# Altium PCB L-LRMAM36-FANN4-DK01-0402-03.PcbDoc
Units mm, origin at the board's own origin, x right, y up, seen from the top; angles counter-clockwise.
Board outline 222.2 x 196.2 mm, 4 copper layers (Top Layer, GND, VCC, Bottom Layer), stack 1.59 mm thick; 7 components, 177 nets, 10 pads, 0 vias.
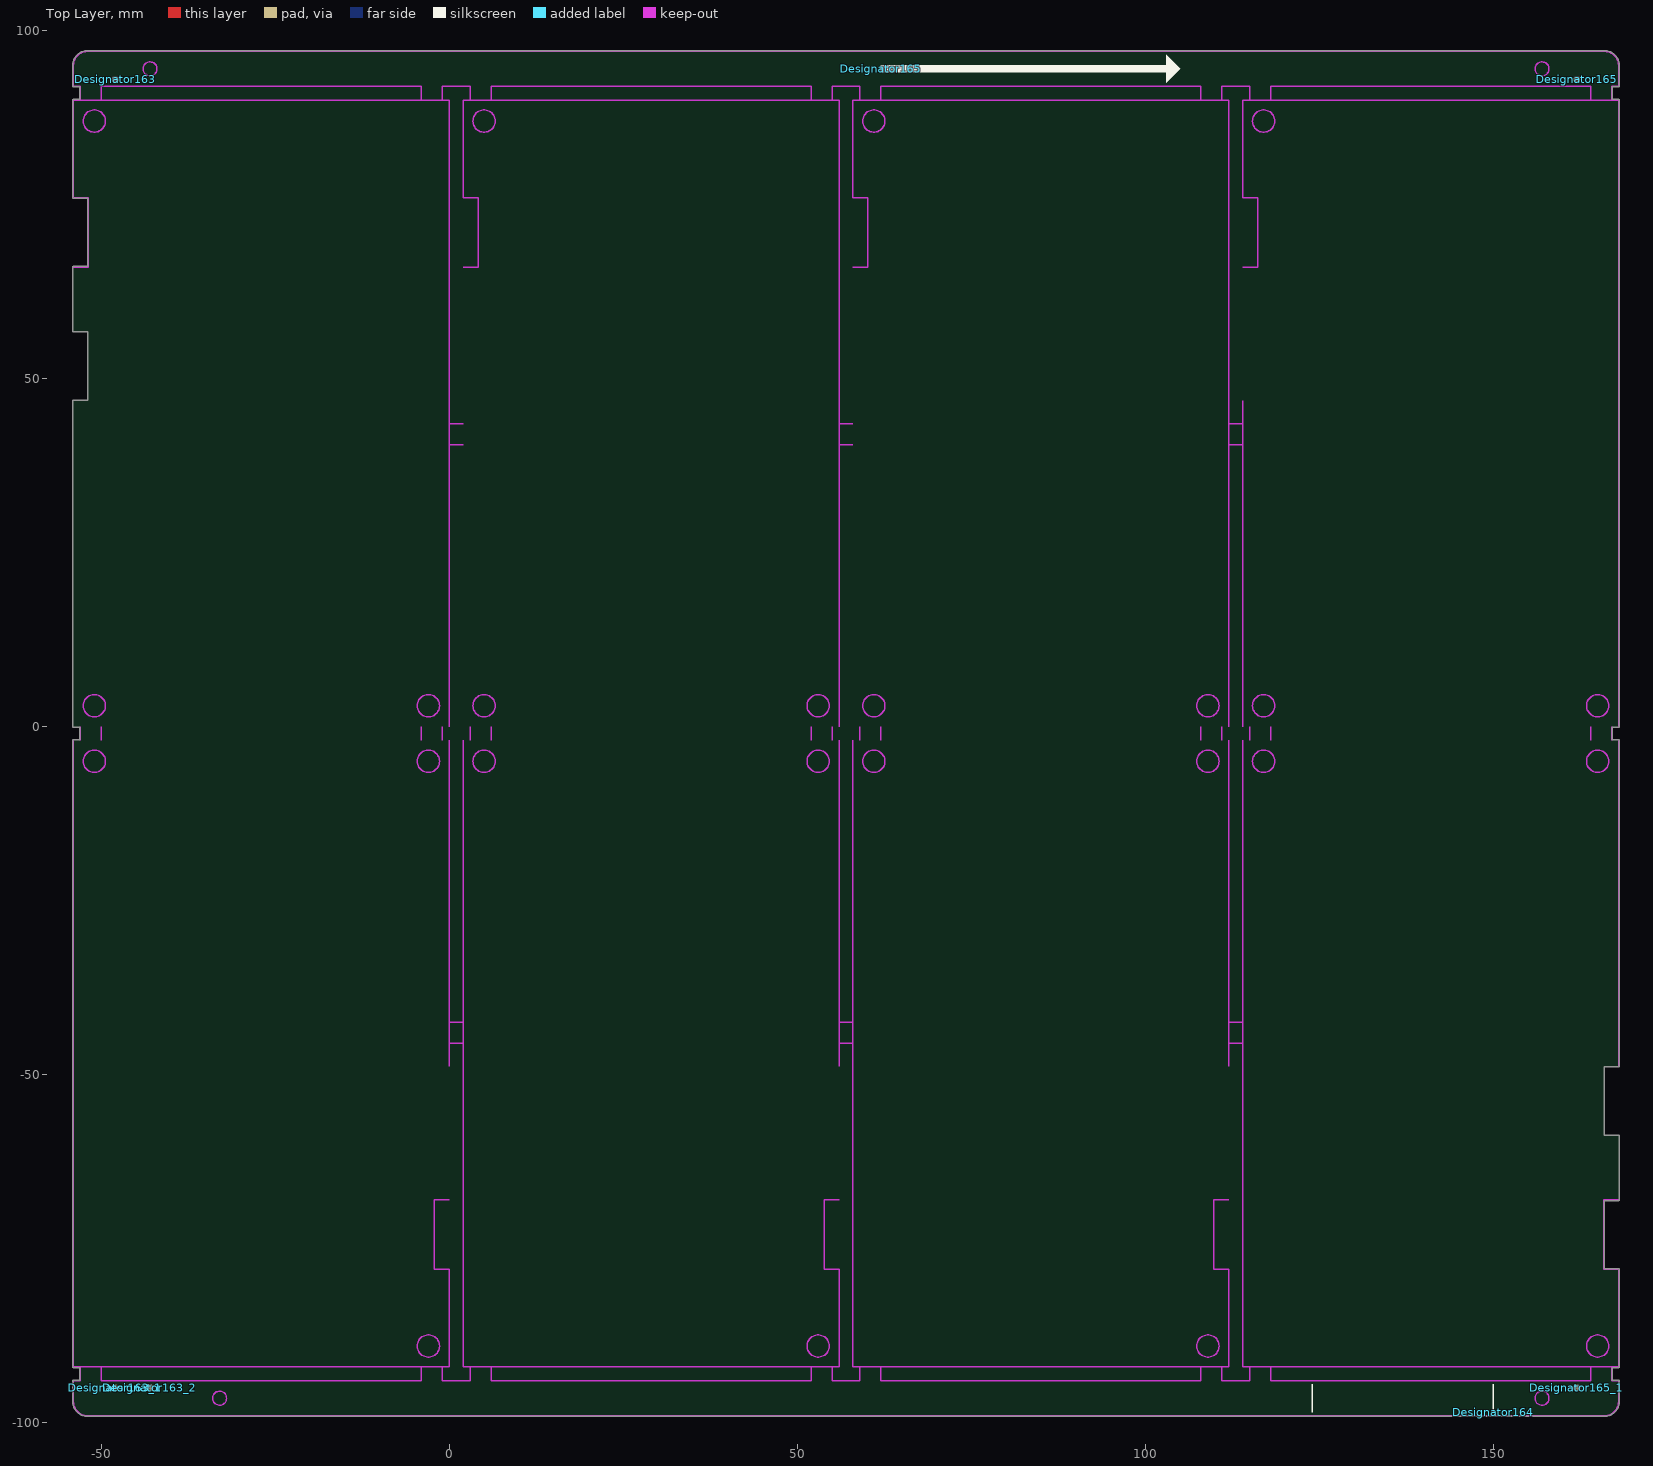
[diagram p0: Top Layer view]
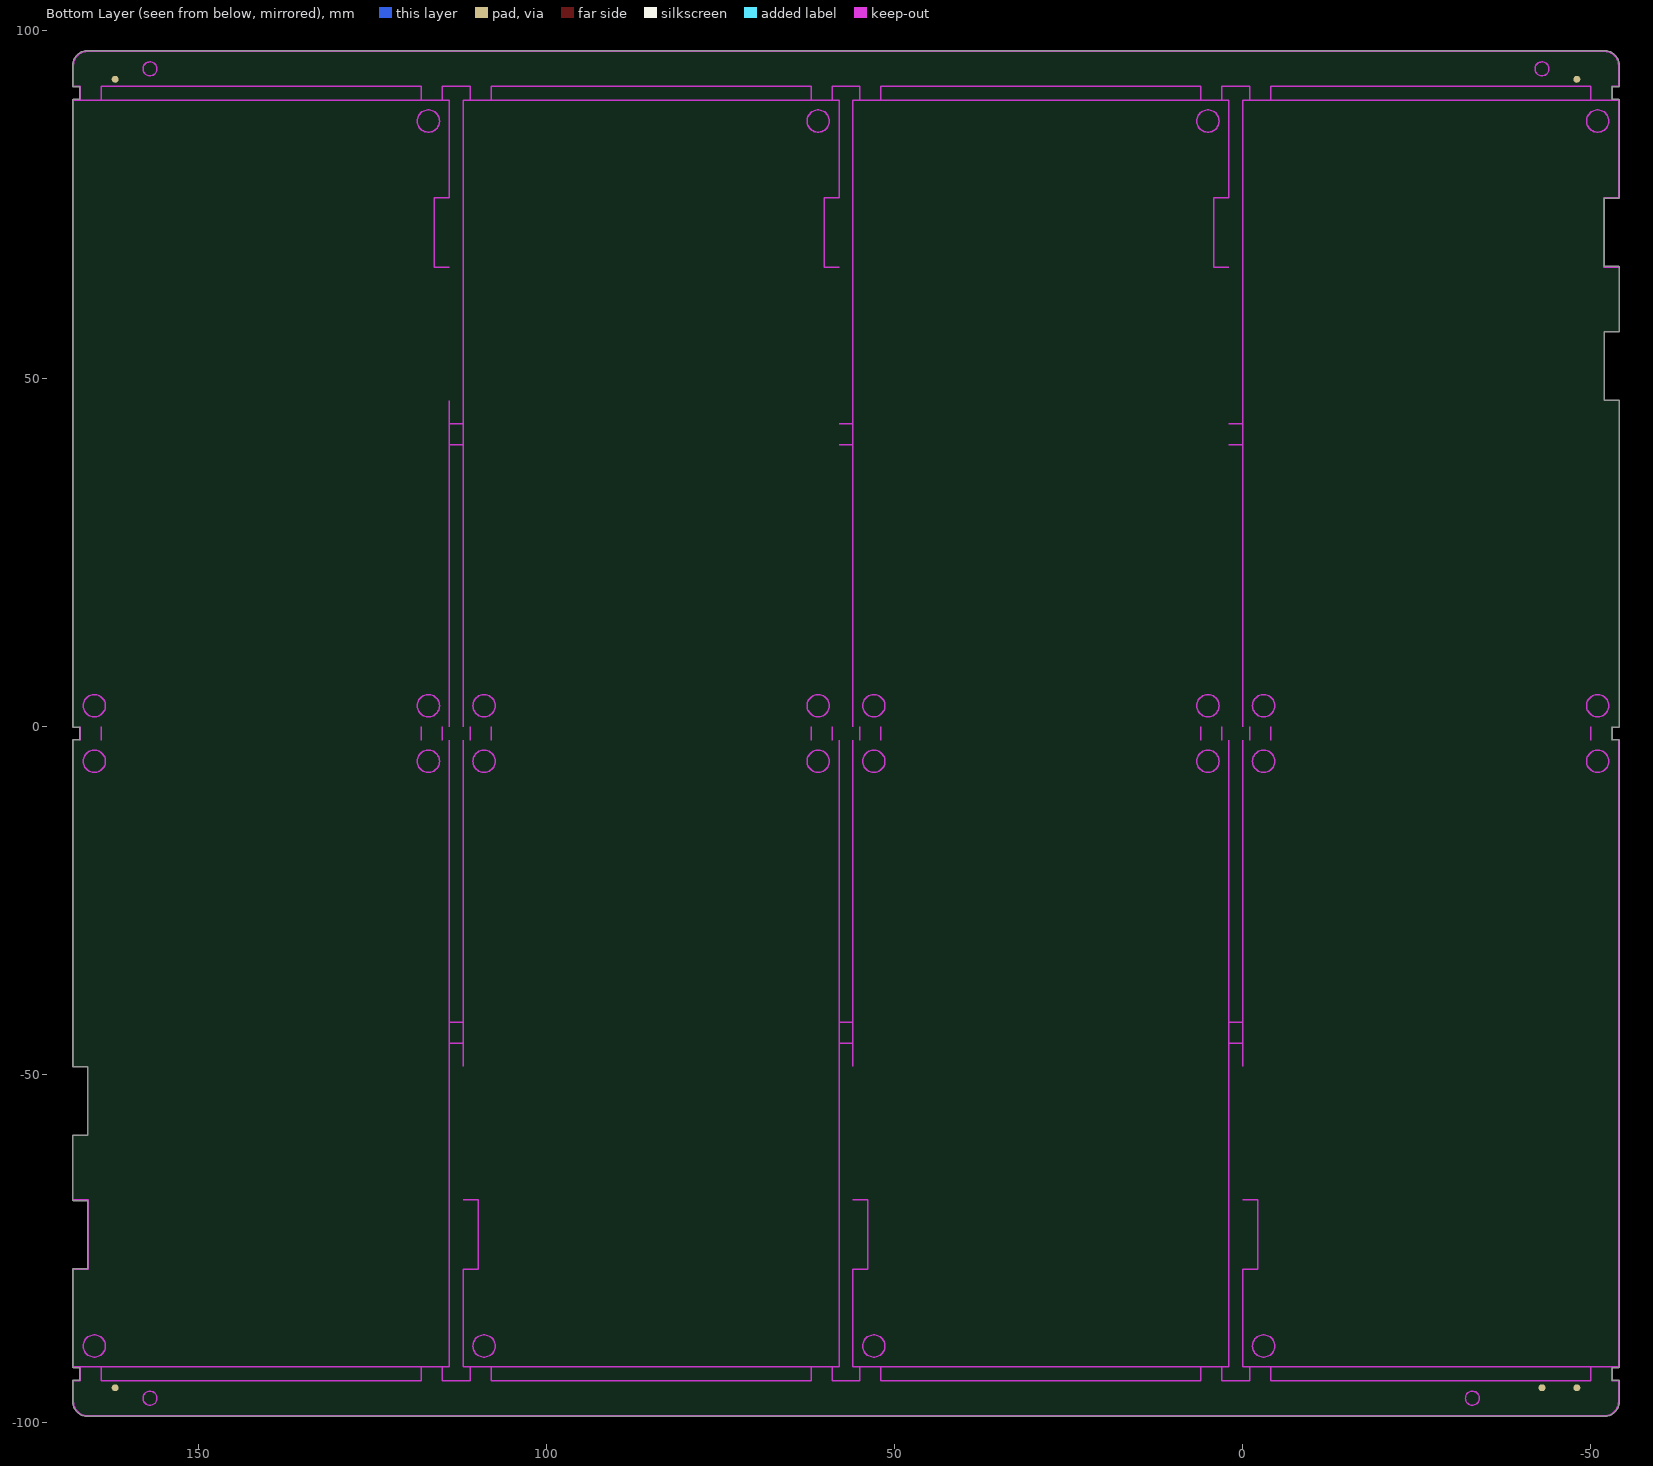
[diagram p1: Bottom Layer view, seen from below]

## Layer stack, top to bottom
Top Solder: solder mask 0.0102, Solder Resist, Dk 3.5
Top Layer: signal copper 0.035
Dielectric 2: prepreg 0.21, PP-006, Dk 4.1
GND: signal copper 0.018
Dielectric 1: dielectric 1.064, FR-4, Dk 4.8
VCC: signal copper 0.018
Dielectric 3: prepreg 0.21, PP-006, Dk 4.1
Bottom Layer: signal copper 0.035
Bottom Solder: solder mask 0.0102, Solder Resist, Dk 3.5

## Board outline
-54.1,-92 ccw(c-54,-92) -54,-92.1 -53.1,-92.1 -53.1,-93.9 -54,-93.9 ccw(c-54,-94) -54.1,-94 -54.1,-97 ccw(c-52,-97) -52,-99.1 -51.998,-99.1 166,-99.1 ccw(c166,-97) 168.1,-97 168.1,-94 ccw(c168,-94) 168,-93.9 167.1,-93.9 167.1,-92.1 168,-92.1 ccw(c168,-92) 168.1,-92 168.1,-78 ccw(c168,-78) 168,-77.9 165.95,-77.9 165.95,-68.1 168,-68.1 ccw(c168,-68) 168.1,-68 168.1,-58.8 ccw(c168,-58.8) 168,-58.7 165.95,-58.7 165.95,-48.9 168,-48.9 ccw(c168,-48.8) 168.1,-48.8 168.1,-2 ccw(c168,-2) 168,-1.9 167.1,-1.9 167.1,-0.1 168,-0.1 ccw(c168,0) 168.1,0 168.1,90 ccw(c168,90) 168,90.1 167.1,90.1 167.1,91.9 168,91.9 ccw(c168,92) 168.1,92 168.1,95 ccw(c166,95) 166,97.1 -52,97.1 ccw(c-52,95) -54.1,95 -54.1,92 ccw(c-54,92) -54,91.9 -53.1,91.9 -53.1,90.1 -54,90.1 ccw(c-54,90) -54.1,90 -54.1,76 ccw(c-54,76) -54,75.9 -51.95,75.9 -51.95,66.1 -54,66.1 ccw(c-54,66) -54.1,66 -54.1,56.8 ccw(c-54,56.8) -54,56.7 -51.95,56.7 -51.95,46.9 -54,46.9 ccw(c-54,46.8) -54.1,46.8 -54.1,0 ccw(c-54,0) -54,-0.1 -53.1,-0.1 -53.1,-1.9 -54,-1.9 ccw(c-54,-2) -54.1,-2

## Design rules (kind name [scope] priority, off if disabled: settings)
Clearance Clearance_via [IsVia vs IsVia] p1: gap=0.4 ignorepadtopadclearanceinfootprint=FALSE
Clearance Clearance_keepout [IsKeepOut] p2: gap=0.3 ignorepadtopadclearanceinfootprint=FALSE
Clearance Clearance_polygon [InPolygon] p3: gap=0.254 ignorepadtopadclearanceinfootprint=FALSE
Clearance Clearance_1 [InComponent('U10') or InComponent('K1')or InComponent('K2')] p4: gap=0.152 ignorepadtopadclearanceinfootprint=FALSE
Clearance [All] p5: gap=0.152 ignorepadtopadclearanceinfootprint=FALSE except(0.203: Arc-Fill Arc-Poly Arc-Region Track-Fill Track-Poly Track-Region SMDPad-Fill SMDPad-Poly SMDPad-Region THPad-Fill THPad-Poly THPad-Region Via-Fill Via-Poly Via-Region Fill-Fill Fill-Poly Fill-Region Poly-Poly Poly-Region Region-Region)
DiffPairsRouting [All] p1: maxlimit=0.254 minlimit=0.152 mostfreqgap=0.254 toplayer_minwidth=0.241 toplayer_maxwidth=0.381 toplayer_prefwidth=0.381 midlayer1_minwidth=0.191 midlayer1_maxwidth=0.381 midlayer1_prefwidth=0.381 midlayer2_minwidth=0.191 midlayer2_maxwidth=0.381 midlayer2_prefwidth=0.381 bottomlayer_minwidth=0.241 bottomlayer_maxwidth=0.381 bottomlayer_prefwidth=0.381 maxuncoupledlength=12.7
HoleSize [All] p1: absolutevalues=TRUE maxlimit=5 minlimit=0.025 maxpercent=80.000 minpercent=20.000
HoleToHoleClearance [All] p1: gap=0.05 allowstackedmicrovias=TRUE
MinimumSolderMaskSliver [All] p1: minsoldermaskwidth=0
PolygonConnect [All] p1: thpad.connectstyle=Relief thpad.reliefconductorwidth=0.254 thpad.reliefentries=4 thpad.polygonreliefangle="90 Angle" thpad.airgapwidth=0.254 smdpad.connectstyle=Direct smdpad.reliefconductorwidth=0.254 smdpad.reliefentries=4 smdpad.polygonreliefangle="90 Angle" smdpad.airgapwidth=0.254 via.connectstyle=Direct via.reliefconductorwidth=0.254 via.reliefentries=4 via.polygonreliefangle="90 Angle" via.airgapwidth=0.254
RoutingVias [All] p1: holewidth=0.3 width=0.5 viastyle="Through Hole" minholewidth=0.3 minwidth=0.5 maxholewidth=3 maxwidth=5
SilkToSilkClearance [All] p1: silktosilkclearance=0
SilkToSolderMaskClearance [IsPad] p1: minsilkscreentomaskgap=0 clearancetoexposedcopper=TRUE
SolderMaskExpansion [All] p1: expansion=0.102 istentingtop=FALSE
SupplyNets "Schematic Supply Nets_13" [InNet('VCC_1V8')] p1: voltage=0.000
SupplyNets "Schematic Supply Nets_12" [InNet('VDD_3.3V')] p2: voltage=0.000
SupplyNets "Schematic Supply Nets_11" [InNet('3.3V_8311')] p3: voltage=0.000
SupplyNets "Schematic Supply Nets_10" [InNet('PAGND')] p4: voltage=0.000
SupplyNets "Schematic Supply Nets_9" [InNet('VBUS1')] p5: voltage=0.000
SupplyNets "Schematic Supply Nets_8" [InNet('VCC_2V8')] p6: voltage=0.000
SupplyNets "Schematic Supply Nets_7" [InNet('VBAT_Li')] p7: voltage=0.000
SupplyNets "Schematic Supply Nets_6" [InNet('GND')] p8: voltage=0.000
SupplyNets "Schematic Supply Nets_5" [InNet('VDD_PA')] p9: voltage=0.000
SupplyNets "Schematic Supply Nets_4" [InNet('V3P3')] p10: voltage=0.000
SupplyNets "Schematic Supply Nets_3" [InNet('MIC_N')] p11: voltage=0.000
SupplyNets "Schematic Supply Nets_2" [InNet('VDD_3V3')] p12: voltage=0.000
SupplyNets "Schematic Supply Nets_1" [InNet('V5P0')] p13: voltage=0.000
SupplyNets "Schematic Supply Nets" [InNet('VBUS2')] p14: voltage=0.000
UnRoutedNet [All] p1: checkbadconnections=TRUE
Width [All] p1: maxlimit=3.81 minlimit=0.152 preferedwidth=0.254
23 further rules are at their usual default settings.

## Classes and differential pairs
differential pair USB2: +USB2_P -USB2_N
differential pair USB1: +USB1_P -USB1_N
differential pair D2: +D2_P -D2_N
differential pair D1: +D1_P -D1_N
differential pair AM36_USBD: +AM36_USBD_P -AM36_USBD_N

## Components (designator, comment, footprint, x,y, rotation, side; value= is the part's Value field where it differs from the comment)
Designator163 "Comment" MARK -48,93 r0 top
Designator163_1 "Comment" MARK -48,-95 r0 top
Designator163_2 "Comment" MARK -43,-95 r0 top
Designator164 "Comment" "White oil-26X4" 150,-98.5 r0 top
Designator165 "Comment" Arrow 62,94.5 r0 top
Designator165 "Comment" MARK 162,93 r180 top
Designator165_1 "Comment" MARK 162,-95 r180 top

## Footprints (in the part's own frame and the unit in brackets; to place one, negate y for a bottom-side part, rotate by r counter-clockwise, add the part's x,y. Pads: shape width x height; smd on the part's side, far side on the other; paste and mask are expansions set on the pad)
Arrow [mm] "方向箭头"
  silkscreen extent 0,-2 43,2
MARK [mm]
  round 1 smd mask+0.5: 1(0,0)
  round 1 smd far side mask+0.5: 2(0,0)
  Top Layer pour cut-out: -1.5,0 -1.386,-0.574 -1.061,-1.061 -0.574,-1.386 0,-1.5 0,-1.5 0.574,-1.386 1.061,-1.061 1.386,-0.574 1.5,0 1.5,0 1.386,0.574 1.061,1.061 0.574,1.386 0,1.5 0,1.5 -0.574,1.386 -1.061,1.061 -1.386,0.574 -1.5,0
  Bottom Layer pour cut-out: -1.5,0 -1.386,-0.574 -1.061,-1.061 -0.574,-1.386 0,-1.5 0,-1.5 0.574,-1.386 1.061,-1.061 1.386,-0.574 1.5,0 1.5,0 1.386,0.574 1.061,1.061 0.574,1.386 0,1.5 0,1.5 -0.574,1.386 -1.061,1.061 -1.386,0.574 -1.5,0
"White oil-26X4" [mm] "二维码白油框"
  silkscreen extent -26,0 0,4

## Nets (pads, with @x,y where several pads share a name; then routed paths per layer and width w, separated by ;. In a path a pad name is that pad's centre, name@x,y a point inside that pad or via, vN(x,y) a via of type N, cw(c..) or ccw(c..) an arc to the next point about the centre after c; other vN are vias at no path point)
3.3V_8311: 
A0: 
A1: 
A2: 
AM36_USBD_N: 
AM36_USBD_P: 
AUD_N: 
AUD_P: 
BOOT: 
CHIP_PU: 
CODEC_I2S0_BCLK: 
CODEC_I2S0_DIN: 
CODEC_I2S0_DOUT: 
CODEC_I2S0_LRCK: 
CODEC_I2S0_MCLK: 
D0: 
D1: 
D1_N: 
D1_P: 
D2: 
D2_N: 
D2_P: 
D3: 
DTR: 
GND: 
GPIO1: 
GPIO2: 
GPIO3: 
GPIO4: 
GPIO5: 
GPIO6: 
GPIO7: 
GPIO8: 
GPIO9: 
GPIO10: 
GPIO11: 
GPIO12: 
GPIO13: 
GPIO14: 
GPIO15: 
GPIO16: 
GPIO18: 
GPIO45: 
GPIO46: 
HSYNC: 
I2C0_SCL: 
I2C0_SDA: 
KEY_ADC: 
LCD_CLK: 
LCD_CS1: 
LCD_CS2: 
LCD_D0: 
LCD_D1: 
LCD_D2: 
LCD_D3: 
LCD_LED: 
LCD_RST: 
LCD_TE: 
LED_B: 
LED_G: 
LED_R: 
LoRa_RF: 
MCLK: 
MIC_N: 
MIC_N_OUT: 
MIC_P: 
MIC_P_OUT: 
MUTE: 
NetANT1_1: 
NetANT2_1: 
NetC2_2: 
NetC13_1: 
NetC18_2: 
NetC30_2: 
NetC31_2: 
NetC35_1: 
NetC35_2: 
NetC36_1: 
NetC36_2: 
NetC37_2: 
NetC38_2: 
NetC39_2: 
NetC40_2: 
NetC41_2: 
NetC42_1: 
NetC42_2: 
NetC43_1: 
NetC43_2: 
NetC45_2: 
NetC48_2: 
NetC53_2: 
NetC57_2: 
NetC58_2: 
NetC60_1: 
NetC66_2: 
NetC67_2: 
NetC68_2: 
NetC69_1: 
NetC70_2: 
NetC71_1: 
NetC79_2: 
NetC90_1: 
NetC91_2: 
NetCON1_A5: 
NetCON1_B5: 
NetCON2_A5: 
NetCON2_B5: 
NetCON5_1: 
NetCON5_2: 
NetD10_1: 
NetD10_2: 
NetD10_3: 
NetFPC1_3: 
NetFPC1_5: 
NetK3_1: 
NetK4_1: 
NetK5_1: 
NetK6_1: 
NetL2_1: 
NetLED1_A: 
NetLED2_K: 
NetLED3_K: 
NetR5_1: 
NetR6_2: 
NetR7_1: 
NetR9_1: 
NetR11_1: 
NetR15_1: 
NetR16_2: 
NetR17_2: 
NetR22_1: 
NetR23_2: 
NetR35_2: 
NetR36_1: 
NetR73_2: 
NetR75_1: 
NetR85_2: 
NetR86_1: 
NetR87_1: 
NetR95_2: 
OUTN: 
OUTP: 
P0: 
P1: 
P2: 
P3: 
P4: 
P5: 
P6: 
P7: 
PAGND: 
PCLK: 
PWDN: 
RTS: 
TP_INT: 
TP_RST: 
UART0_RX: 
UART0_TX: 
UART2_RX: 
UART2_TX: 
USB1_N: 
USB1_P: 
USB2_N: 
USB2_P: 
V3P3: 
V5P0: 
VBAT_ADC: 
VBAT_Li: 
VBUS1: 
VBUS2: 
VCC_1V8: 
VCC_2V8: 
VDD_3.3V: 
VDD_3V3: 
VDD_PA: 
VSYNC: 
WiFi_RF: 
pads on no net: Designator163.1 Designator163.2 Designator163_1.1 Designator163_1.2 Designator163_2.1 Designator163_2.2 Designator165.1 Designator165.2 Designator165_1.1 Designator165_1.2

## Keep-outs
Keep-Out Layer:
  circle w0.2: c-33,-96.5 r1
  circle w0.2: c157,-96.5 r1
  circle w0.2: c157,94.5 r1
  circle w0.2: c-43,94.5 r1
  circle w0.2: c109,3 r1.6
  circle w0.2: c61,3 r1.6
  circle w0.2: c61,87 r1.6
  circle w0.2: c53,-89 r1.6
  circle w0.2: c53,-5 r1.6
  circle w0.2: c5,-5 r1.6
  circle w0.2: c-51,-5 r1.6
  circle w0.2: c-3,-5 r1.6
  circle w0.2: c-3,-89 r1.6
  circle w0.2: c117,87 r1.6
  circle w0.2: c117,3 r1.6
  circle w0.2: c165,3 r1.6
  circle w0.2: c61,-5 r1.6
  circle w0.2: c109,-5 r1.6
  circle w0.2: c109,-89 r1.6
  circle w0.2: c5,87 r1.6
  circle w0.2: c5,3 r1.6
  circle w0.2: c53,3 r1.6
  circle w0.2: c-3,3 r1.6
  circle w0.2: c-51,3 r1.6
  circle w0.2: c-51,87 r1.6
  circle w0.2: c165,-89 r1.6
  circle w0.2: c165,-5 r1.6
  circle w0.2: c117,-5 r1.6
  lines w0.2: -54,-2 -54,-92 0,-92 0,-78 -2.15,-78 -2.15,-68 0,-68 ; -54,66 -51.85,66 -51.85,76 -54,76 -54,90 0,90 0,0 ; -53,-92 -53,-94 -54,-94 -54,-97 ccw(c-52,-97) -52,-99 166,-99 ccw(c166,-97) 168,-97 168,-94 167,-94 167,-92 ; -53,-2 -53,0 ; -53,90 -53,92 -54,92 -54,95 cw(c-52,95) -52,97 166,97 cw(c166,95) 168,95 168,92 167,92 167,90 ; -50,-92 -50,-94 -4,-94 -4,-92 ; -50,-2 -50,0 ; -50,90 -50,92 -4,92 -4,90 ; -4,-2 -4,0 ; -1,-92 -1,-94 3,-94 3,-92 ; -1,-2 -1,0 ; -1,90 -1,92 3,92 3,90 ; 0,-48.8 0,-2 ; 0,-45.5 2,-45.5 ; 0,-42.5 2,-42.5 ; 0,40.5 2,40.5 ; 0,43.5 2,43.5 ; 2,-2 2,-92 56,-92 56,-78 53.85,-78 53.85,-68 56,-68 ; 2,66 4.15,66 4.15,76 2,76 2,90 56,90 56,0 ; 3,-2 3,0 ; 6,-92 6,-94 52,-94 52,-92 ; 6,-2 6,0 ; 6,90 6,92 52,92 52,90 ; 52,-2 52,0 ; 55,-92 55,-94 59,-94 59,-92 ; 55,-2 55,0 ; 55,90 55,92 59,92 59,90 ; 56,-48.8 56,-2 ; 56,-45.5 58,-45.5 ; 56,-42.5 58,-42.5 ; 56,40.5 58,40.5 ; 56,43.5 58,43.5 ; 58,-2 58,-92 112,-92 112,-78 109.85,-78 109.85,-68 112,-68 ; 58,66 60.15,66 60.15,76 58,76 58,90 112,90 112,0 ; 59,-2 59,0 ; 62,-92 62,-94 108,-94 108,-92 ; 62,-2 62,0 ; 62,90 62,92 108,92 108,90 ; 108,-2 108,0 ; 111,-92 111,-94 115,-94 115,-92 ; 111,-2 111,0 ; 111,90 111,92 115,92 115,90 ; 112,-48.8 112,-2 ; 112,-45.5 114,-45.5 ; 112,-42.5 114,-42.5 ; 112,40.5 114,40.5 ; 112,43.5 114,43.5 ; 114,-2 114,-92 168,-92 168,-78 165.85,-78 165.85,-68 168,-68 ; 114,0 114,46.8 ; 114,66 116.15,66 116.15,76 114,76 114,90 168,90 168,0 ; 115,-2 115,0 ; 118,-92 118,-94 164,-94 164,-92 ; 118,-2 118,0 ; 118,90 118,92 164,92 164,90 ; 164,-2 164,0 ; 167,-2 167,0 ; 168,-48.8 168,-2

## Silkscreen, mask and mechanical layers (free items; w line width, h text height)
Top Solder:
  rectangle: -53,-94 -50,-92
  region: -1,-92 -4,-92 -4,-94 -1,-94
  region: 55,-92 52,-92 52,-94 55,-94
  rectangle: 3,-94 6,-92
  region: 111,-92 108,-92 108,-94 111,-94
  rectangle: 59,-94 62,-92
  region: 167,-92 164,-92 164,-94 167,-94
  rectangle: 115,-94 118,-92
  rectangle: 115,-2 118,0
  region: 167,0 164,0 164,-2 167,-2
  rectangle: 59,-2 62,0
  region: 111,0 108,0 108,-2 111,-2
  rectangle: 3,-2 6,0
  region: 55,0 52,0 52,-2 55,-2
  rectangle: -53,-2 -50,0
  region: -1,0 -4,0 -4,-2 -1,-2
  rectangle: 115,90 118,92
  region: 167,92 164,92 164,90 167,90
  rectangle: 59,90 62,92
  region: 111,92 108,92 108,90 111,90
  rectangle: 3,90 6,92
  region: 55,92 52,92 52,90 55,90
  region: -1,92 -4,92 -4,90 -1,90
  rectangle: -53,90 -50,92
  region: 114,-42.5 112,-42.5 112,-45.5 114,-45.5
  region: 58,-42.5 56,-42.5 56,-45.5 58,-45.5
  region: 2,-42.5 0,-42.5 0,-45.5 2,-45.5
  rectangle: 112,40.5 114,43.5
  rectangle: 56,40.5 58,43.5
  rectangle: 0,40.5 2,43.5
Bottom Solder:
  rectangle: -53,-94 -50,-92
  region: -1,-92 -4,-92 -4,-94 -1,-94
  region: 55,-92 52,-92 52,-94 55,-94
  rectangle: 3,-94 6,-92
  region: 111,-92 108,-92 108,-94 111,-94
  rectangle: 59,-94 62,-92
  region: 167,-92 164,-92 164,-94 167,-94
  rectangle: 115,-94 118,-92
  rectangle: 115,-2 118,0
  region: 167,0 164,0 164,-2 167,-2
  rectangle: 59,-2 62,0
  region: 111,0 108,0 108,-2 111,-2
  rectangle: 3,-2 6,0
  region: 55,0 52,0 52,-2 55,-2
  rectangle: -53,-2 -50,0
  region: -1,0 -4,0 -4,-2 -1,-2
  rectangle: 115,90 118,92
  region: 167,92 164,92 164,90 167,90
  rectangle: 59,90 62,92
  region: 111,92 108,92 108,90 111,90
  rectangle: 3,90 6,92
  region: 55,92 52,92 52,90 55,90
  region: -1,92 -4,92 -4,90 -1,90
  rectangle: -53,90 -50,92
  region: 114,-42.5 112,-42.5 112,-45.5 114,-45.5
  region: 58,-42.5 56,-42.5 56,-45.5 58,-45.5
  region: 2,-42.5 0,-42.5 0,-45.5 2,-45.5
  rectangle: 112,40.5 114,43.5
  rectangle: 56,40.5 58,43.5
  rectangle: 0,40.5 2,43.5
Drill Drawing:
  circle w0.254: c180.851,-71.298 r0.701
  lines w0.254: 180.15,-78.307 180.851,-77.957 181.552,-78.307 181.202,-77.606 181.552,-76.905 180.851,-77.256 180.15,-76.905 180.501,-77.606 180.15,-78.307 ; 180.15,-75.153 181.552,-75.153 181.552,-73.751 180.15,-73.751 180.15,-75.153 ; 180.15,-68.494 180.501,-68.494 180.851,-68.845 181.202,-68.494 181.552,-68.494 181.202,-68.144 181.552,-67.794 181.202,-67.794 180.851,-67.443 180.501,-67.794 180.15,-67.794 180.501,-68.144 180.15,-68.494 ; 180.15,-64.289 181.552,-64.289 180.851,-65.691 180.15,-64.289
  lines w0.381: 178.879,-79.253 317.172,-79.253 ; 178.879,-63.483 317.172,-63.483 ; 186.987,-82.407 186.987,-60.329 ; 195.169,-82.407 195.169,-60.329 ; 209.84,-82.407 209.84,-60.329 ; 216.13,-82.407 216.13,-60.329 ; 225.283,-82.407 225.283,-60.329 ; 242.606,-82.407 242.606,-60.329 ; 250.107,-82.407 250.107,-60.329 ; 259.908,-82.407 259.908,-60.329 ; 276.189,-82.407 276.189,-60.329 ; 286.032,-82.407 286.032,-60.329 ; 301.335,-82.407 301.335,-60.329 ; 178.879,-82.407 317.172,-82.407 317.172,-60.329 178.879,-60.329 178.879,-82.407
  text "Symbol" at 180.772,-62.537 h1.83
  text "Count" at 187.934,-62.537 h1.83
  text "Hole Size" at 196.115,-62.537 h1.83
  text "Plated" at 210.787,-62.537 h1.83
  text "Hole Type" at 217.076,-62.537 h1.83
  text "Drill Layer Pair" at 226.229,-62.537 h1.83
  text "Via/Pad" at 243.552,-62.537 h1.83
  text "Pad Shape" at 251.053,-62.537 h1.83
  text "Template" at 260.854,-62.537 h1.83
  text "Description" at 277.136,-62.537 h1.83
  text "Hole Tolerance (+)" at 286.978,-62.537 h1.83
  text "Hole Tolerance (-)" at 302.281,-62.537 h1.83
  text "16" at 187.934,-65.691 h1.52
  text "0.600mm (23.62mil)" at 196.115,-65.691 h1.52
  text "PTH" at 210.787,-65.691 h1.52
  text "Slot" at 217.076,-65.691 h1.52
  text "Top Layer - Bottom Layer" at 226.229,-65.691 h1.52
  text "Pad" at 243.552,-65.691 h1.52
  text "Rounded" at 251.053,-65.691 h1.52
  text "r100_180h60_140r50p0" at 260.854,-65.691 h1.52
  text "16" at 187.934,-68.845 h1.52
  text "0.600mm (23.62mil)" at 196.115,-68.845 h1.52
  text "PTH" at 210.787,-68.845 h1.52
  text "Slot" at 217.076,-68.845 h1.52
  text "Top Layer - Bottom Layer" at 226.229,-68.845 h1.52
  text "Pad" at 243.552,-68.845 h1.52
  text "Rounded" at 251.053,-68.845 h1.52
  text "r100_220h60_180r50p0" at 260.854,-68.845 h1.52
  text "32" at 187.934,-71.999 h1.52
  text "2.600mm (102.36mil)" at 196.115,-71.999 h1.52
  text "NPTH" at 210.787,-71.999 h1.52
  text "Round" at 217.076,-71.999 h1.52
  text "Top Layer - Bottom Layer" at 226.229,-71.999 h1.52
  text "Pad" at 243.552,-71.999 h1.52
  text "Rounded" at 251.053,-71.999 h1.52
  text "c450hn260z300" at 260.854,-71.999 h1.52
  text "80" at 187.934,-75.153 h1.52
  text "0.900mm (35.43mil)" at 196.115,-75.153 h1.52
  text "NPTH" at 210.787,-75.153 h1.52
  text "Round" at 217.076,-75.153 h1.52
  text "Top Layer - Bottom Layer" at 226.229,-75.153 h1.52
  text "Pad" at 243.552,-75.153 h1.52
  text "Rounded" at 251.053,-75.153 h1.52
  text "c90hn90" at 260.854,-75.153 h1.52
  text "6432" at 187.934,-78.307 h1.52
  text "0.300mm (11.81mil)" at 196.115,-78.307 h1.52
  text "PTH" at 210.787,-78.307 h1.52
  text "Round" at 217.076,-78.307 h1.52
  text "Top Layer - Bottom Layer" at 226.229,-78.307 h1.52
  text "Via" at 243.552,-78.307 h1.52
  text "Rounded" at 251.053,-78.307 h1.52
  text "v50h30m0mx0" at 260.854,-78.307 h1.52
  text "6576 Total" at 187.934,-81.461 h1.52
  text "Slot definitions :" at 180.772,-83.669 h1.52
  text "Routed Path Length" at 191.151,-83.669 h1.52
  text "= Calculated from tool start centre position to tool end centre position." at 204.014,-83.669 h1.52
  text "Hole Length" at 191.151,-84.931 h1.52
  text "= Routed Path Length + Tool Size = Slot length as defined in the PCB layout" at 199.239,-84.931 h1.52

## Panel: embedded boards
"L-LRMAM36-FANN4-DK01_V03.PcbDoc" at 58,-2, 1 rows x 1 columns, spacing 63.5 x 38.1, rotation 180
"L-LRMAM36-FANN4-DK01_V03.PcbDoc" at 114,-2, 1 rows x 1 columns, spacing 63.5 x 38.1, rotation 180
"L-LRMAM36-FANN4-DK01_V03.PcbDoc" at 2,-2, 1 rows x 1 columns, spacing 63.5 x 38.1, rotation 180
"L-LRMAM36-FANN4-DK01_V03.PcbDoc" at -54,-2, 1 rows x 1 columns, spacing 63.5 x 38.1, rotation 180
"L-LRMAM36-FANN4-DK01_V03.PcbDoc" at 168,0, 1 rows x 1 columns, spacing 63.5 x 38.1, rotation 0
"L-LRMAM36-FANN4-DK01_V03.PcbDoc" at 112,0, 1 rows x 1 columns, spacing 63.5 x 38.1, rotation 0
"L-LRMAM36-FANN4-DK01_V03.PcbDoc" at 56,0, 1 rows x 1 columns, spacing 63.5 x 38.1, rotation 0
"L-LRMAM36-FANN4-DK01_V03.PcbDoc" at 0,0, 1 rows x 1 columns, spacing 63.5 x 38.1, rotation 0